# Altium PCB 2016.PcbDoc (part 6 of 6)
Units mm, origin at the board's own origin, x right, y up, seen from the top; angles counter-clockwise.
Board outline 169.8 x 134.24 mm, 2 copper layers (Top Layer, Bottom Layer); 131 components, 191 nets, 797 pads, 168 vias.
Unrouted connection lines stored in the file: 2.
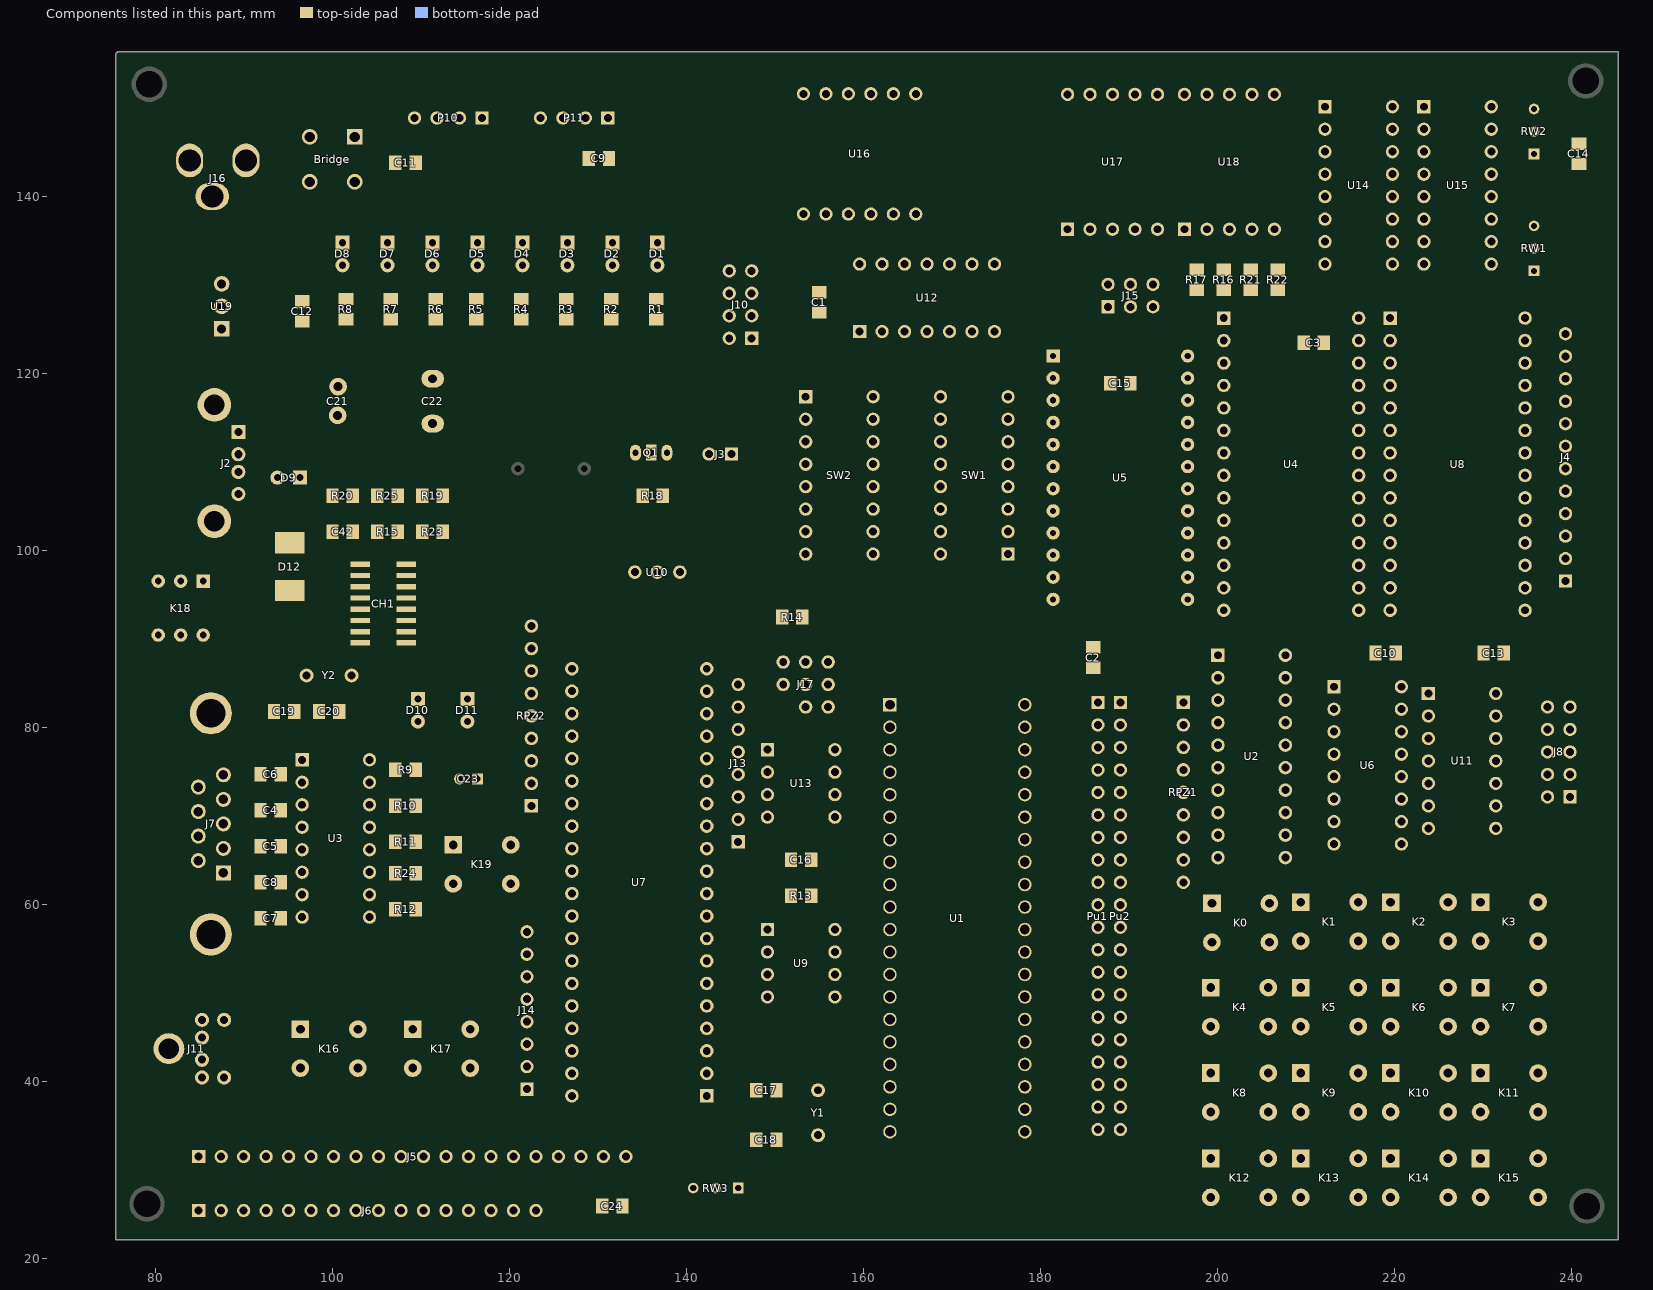
[diagram p6: the components of this part, seen from the top]

## Via types
v1: diameter 1.27, hole 0.711, Top Layer to Bottom Layer, 165 vias
v2: diameter 1, hole 0.5, Top Layer to Bottom Layer, 3 vias

## Nets (pads, with @x,y where several pads share a name; then routed paths per layer and width w, separated by ;. In a path a pad name is that pad's centre, name@x,y a point inside that pad or via, vN(x,y) a via of type N, cw(c..) or ccw(c..) an arc to the next point about the centre after c; other vN are vias at no path point) (continued)
pads on no net: CH1.9 CH1.10 CH1.11 CH1.12 CH1.13 CH1.14 CH1.15 J2.5 J2.6 J5.16 J5.18 J7.1 J7.4 J7.6 J7.7 J7.8 J7.9 J7.10 J7.11 J8.2 J11.2 J11.6 J11.S K0.3 K0.4 K1.3 K1.4 K2.3 K2.4 K3.3 K3.4 K4.3 K4.4 K5.3 K5.4 K6.3 K6.4 K7.3 K7.4 K8.3 K8.4 K9.3 K9.4 K10.3 K10.4 K11.3 K11.4 K12.3 K12.4 K13.3 K13.4 K14.3 K14.4 K15.3 K15.4 K16.3 K16.4 K17.3 K17.4 K18.1 K18.4 K18.5 K18.6 K19.3 K19.4 U3.12 U3.13 U3.14 U5.19 U5.23 U11.8 U11.9 U11.10 U11.11 U11.12 U11.13 U12.3 U12.4 U13.7 U15.9

## Polygon pours and split planes (outlines as drawn)
GND on Top Layer "Bottom Layer-No Net" (solid): 75.946,155.829 244.348,155.829 244.475,155.702 244.602,155.575 244.602,22.606 76.2,22.606 75.819,22.987 75.946,23.114 75.946,155.829
GND on Bottom Layer "Bottom Layer-No Net" (solid): 76.073,155.956 244.475,155.956 244.475,22.86 244.348,22.987 76.073,22.987 76.073,155.956

## Keep-outs
Keep-Out Layer:
  lines w0.203: 76.073,24.003 77.089,22.987 243.713,22.987 244.602,23.876 244.602,154.686 243.459,155.829 77.089,155.829 76.073,154.813 76.073,24.003

## Silkscreen, mask and mechanical layers (free items; w line width, h text height)
Top Overlay:
  circle w0.254: c124.681,109.22 r5.113
  lines w0.254: 93.091,101.6 97.028,101.6 ; 93.091,102.235 97.155,102.235 ; 93.98,99.06 96.393,99.06 ; 241.427,122.174 241.427,124.333 ; 93.853,97.536 96.52,97.536 95.186,98.87 93.853,97.536 ; 169.545,92.202 ccw(c170.942,92.202) 172.339,92.202 169.545,92.202
  text "蓝" at 122.428,152.908 h2.29 r270
  text "模" at 127.254,152.908 h2.29 r270
  text "块" at 129.794,152.908 h2.29 r270
  text "牙" at 124.968,152.781 h2.29 r270
  text "超" at 107.95,152.654 h2.03 r270
  text "声" at 109.982,152.654 h2.03 r270
  text "波" at 112.014,152.654 h2.03 r270
  text "模" at 114.173,152.654 h2.03 r270
  text "块" at 116.332,152.654 h2.03 r270
  text "74HC595" at 212.725,152.146 h1.02
  text "74HC595" at 223.647,152.019 h1.02
  text "AC 7~9V" at 82.55,149.098 h2.29
  text "100K" at 239.014,148.717 h1.27
  text "TXD" at 122.555,146.177 h1.4
  text "RXD" at 125.095,146.177 h1.4
  text "GND" at 127.381,146.177 h1.4
  text "VCC" at 130.175,146.177 h1.4
  text "GND" at 108.331,145.923 h1.27
  text "P2.1" at 110.617,145.923 h1.27
  text "P2.0" at 113.411,145.923 h1.27
  text "VCC" at 116.332,145.923 h1.27
  text "100K" at 238.887,136.525 h1.27
  text "74ls04" at 162.814,133.477 h1.52
  text "RXD" at 186.436,131.826 h1.5
  text "P2.6" at 191.389,131.826 h1.52
  text "P1.4" at 148.971,131.191 h1.52
  text "P1.5" at 148.971,128.651 h1.52
  text "AD0809" at 223.647,128.143 h1.02
  text "62256" at 207.645,127.889 h1.02
  text "P1.6" at 148.971,125.984 h1.52
  text "P2.5" at 191.897,124.968 h1.52
  text "TXD" at 186.182,124.841 h1.5
  text "VCC" at 241.681,123.952 h1.78
  text "P1.7" at 148.971,123.317 h1.52
  text "1000uF" at 112.268,122.301 h1.5
  text "470uF" at 101.219,122.047 h1.5
  text "EA" at 241.935,121.666 h1.78
  text "GND" at 241.681,118.999 h1.78
  text "CLR" at 241.681,116.459 h1.78
  text "8550" at 135.509,114.681 h1.52
  text "BJ1" at 118.999,114.173 h2.03
  text "IN7" at 241.681,114.173 h1.78
  text "IN6" at 241.681,111.506 h1.78
  text "+" at 126.111,109.855 h4
  text "IN5" at 241.681,108.966 h1.78
  text "IN4" at 241.681,106.426 h1.78
  text "IN3" at 241.681,103.759 h1.78
  text "CS8" at 241.681,101.092 h1.78
  text "CH340G" at 105.918,99.695 h1.02
  text "CS7" at 241.681,98.171 h1.78
  text "SS14" at 92.71,96.774 h1.4 r90
  text "CS6" at 241.554,95.631 h1.78
  text "18B20" at 132.969,93.345 h1.52
  text "+" at 79.756,92.71 h5
  text "DS12887" at 185.039,91.694 h1.27
  text "74HC573" at 200.533,90.17 h1.02
  text "82C55" at 131.191,89.154 h1.52
  text "PC0" at 147.447,84.201 h1.2
  text "P1.0" at 182.245,82.423 h1.4
  text "VCC" at 191.008,82.296 h1.52
  text "PC1" at 147.447,81.788 h1.2
  text "P0.0" at 191.135,79.883 h1.4
  text "P1.1" at 182.245,79.756 h1.4
  text "93C46" at 153.162,79.375 h1.02
  text "PC2" at 147.447,79.248 h1.2
  text "MAX232" at 98.425,78.613 h1.02
  text "P1.2" at 182.245,77.216 h1.4
  text "P0.1" at 191.135,77.216 h1.4
  text "10uF" at 115.443,77.089 h1.52
  text "~" at 148.59,76.962 h2.03 r90
  text "P1.3" at 182.245,74.676 h1.4
  text "P0.2" at 191.135,74.676 h1.4
  text "P0.3" at 191.135,72.263 h1.4
  text "P1.4" at 182.245,72.009 h1.4
  text "P0.4" at 191.135,69.723 h1.4
  text "P1.5" at 182.245,69.596 h1.4
  text "GND" at 238.887,68.834 h1.4
  text "P1.6" at 182.245,67.056 h1.4
  text "P0.5" at 191.135,67.056 h1.4
  text "PC7" at 147.701,66.421 h1.2
  text "P1.7" at 182.245,64.77 h1.4
  text "P0.6" at 191.135,64.516 h1.4
  text "74LS02" at 224.79,64.516 h1.02
  text "74HC138" at 213.487,64.008 h1.02
  text "P0.7" at 191.135,62.103 h1.4
  text "RST" at 182.626,61.976 h1.4
  text "广东技术师范学院" at 239.268,61.341 h4.06 r270
  text "复" at 114.554,60.325 h3.05 r270
  text "位" at 117.602,60.325 h3.05 r270
  text "EA" at 191.516,59.563 h1.4
  text "RXD" at 182.626,59.182 h1.4
  text "ALE" at 191.389,57.023 h1.4
  text "TXD" at 182.626,56.642 h1.4
  text "PA0" at 117.856,56.261 h1.7
  text "P3.2" at 182.245,54.356 h1.4
  text "PSEN" at 191.389,54.356 h1.3
  text "PA1" at 117.983,53.975 h1.7
  text "P2.7" at 191.389,52.07 h1.4
  text "P3.3" at 182.245,51.943 h1.4
  text "PA2" at 117.983,51.435 h1.7
  text "P3.4" at 182.245,49.276 h1.4
  text "P2.6" at 191.389,49.276 h1.4
  text "PA3" at 117.983,49.149 h1.7
  text "P2.5" at 191.389,46.863 h1.4
  text "PA4" at 117.983,46.609 h1.7
  text "P3.5" at 182.245,46.609 h1.4
  text "24C32" at 150.368,46.482 h1.02
  text "P2.4" at 191.389,44.323 h1.4
  text "P3.6" at 182.245,44.069 h1.4
  text "PA5" at 117.983,43.942 h1.7
  text "P2.3" at 191.389,41.91 h1.4
  text "P3.7" at 182.372,41.529 h1.4
  text "PA6" at 117.983,41.275 h1.7
  text "P2.2" at 191.516,39.116 h1.4
  text "X2" at 183.134,38.989 h1.4
  text "PA7" at 117.983,38.481 h1.7
  text "INT0" at 97.663,37.719 h2.3
  text "T0" at 110.871,37.719 h2.4
  text "P2.1" at 191.643,36.576 h1.4
  text "X1" at 183.134,36.449 h1.4
  text "GND" at 182.499,34.036 h1.4
  text "P1.4" at 91.694,33.655 h1.1
  text "P1.5" at 94.234,33.655 h1.1
  text "P1.6" at 96.647,33.655 h1.1
  text "P0.0" at 99.187,33.655 h1.1
  text "P0.1" at 102.108,33.655 h1.1
  text "P0.2" at 104.775,33.655 h1.1
  text "P0.3" at 107.188,33.655 h1.1
  text "P0.4" at 109.601,33.655 h1.1
  text "P0.5" at 112.014,33.655 h1.1
  text "P0.6" at 114.427,33.655 h1.1
  text "P0.7" at 116.84,33.655 h1.1
  text "P1.7" at 119.634,33.655 h1.1
  text "P3.3" at 124.841,33.655 h1.1
  text "GND" at 85.344,33.401 h1.3 r90
  text "P2.0" at 191.77,33.401 h1.4
  text "VCC" at 88.011,33.274 h1.3 r90
  text "VCC" at 131.191,33.274 h1.3 r90
  text "GND" at 133.731,33.147 h1.3 r90
  text "10K" at 142.621,31.623 h1.27
  text "12864" at 125.73,28.829 h1.4
  text "P1.4" at 91.567,27.559 h1.1
  text "P1.5" at 94.107,27.559 h1.1
  text "P1.6" at 96.901,27.559 h1.1
  text "P0.0" at 99.568,27.559 h1.1
  text "P0.1" at 102.108,27.559 h1.1
  text "P0.2" at 104.394,27.559 h1.1
  text "P0.3" at 106.934,27.559 h1.1
  text "P0.4" at 109.474,27.559 h1.1
  text "P0.5" at 112.141,27.559 h1.1
  text "P0.6" at 114.681,27.559 h1.1
  text "P0.7" at 117.348,27.559 h1.1
  text "GND" at 85.344,27.178 h1.3 r90
  text "VCC" at 87.757,27.178 h1.3 r90
  text "GND" at 90.551,27.178 h1.3 r90
  text "GND" at 123.444,27.178 h1.3 r90
  text "VCC" at 120.904,27.051 h1.3 r90
  text "1602" at 125.476,24.765 h1.3
Bottom Overlay:
  text "电阻阻值" at 139.573,129.032 h2.54
  text "R1~R10      1K" at 139.446,125.984 h3
  text "R11~R14     10K" at 139.446,123.444 h3
  text "R15~R17 R21,R22   300" at 139.446,120.904 h3
  text "R18~R20    4.7K" at 139.573,118.491 h3
  text "R23~R25    100" at 139.446,115.824 h3
  text "电容值" at 139.446,107.696 h2.6
  text "C1~C16 ，C24    0.1UF 104" at 139.446,104.267 h3
  text "C17~C20    30pF" at 139.446,101.219 h3
  text "C42   0.01uF  103" at 139.446,98.425 h3

## Text inside footprints (layer, text, board x,y; h text height)
C23: Top Overlay "+" at 119.291,74.918 h1.5 r180
J7: Top Overlay "6" at 81.683,64.433 h1.5 r90; Top Overlay "9" at 81.683,72.743 h1.5 r90; Top Overlay "5" at 91.083,74.128 h1.5 r90; Top Overlay "1" at 91.083,63.298 h1.5 r90
J8: Top Overlay "2" at 237.744,69.596 h1.27 r90; Top Overlay "1" at 240.284,70.104 h1.27 r90; Top Overlay "9" at 240.284,83.82 h1.27 r90; Top Overlay "10" at 237.744,83.82 h1.27 r90
J10: Top Overlay "8" at 145.288,133.096 h1.27 r90; Top Overlay "7" at 147.828,133.096 h1.27 r90; Top Overlay "1" at 147.828,121.92 h1.27 r90; Top Overlay "2" at 145.288,121.412 h1.27 r90
J15: Top Overlay "1" at 185.547,127 h1.27; Top Overlay "2" at 185.039,129.54 h1.27; Top Overlay "5" at 194.183,127 h1.27; Top Overlay "6" at 194.183,129.54 h1.27